# Altium PCB NearFieldProbeSet.PcbDoc (part 3 of 3)
Units mm, origin at the board's own origin, x right, y up, seen from the top; angles counter-clockwise.
Board outline 100 x 100 mm, 6 copper layers (Top Layer, Int1, Int2 (SIG), Int3, Int4, Bottom Layer), stack 1.538 mm thick; 8 components, 12 nets, 232 pads, 4318 vias.
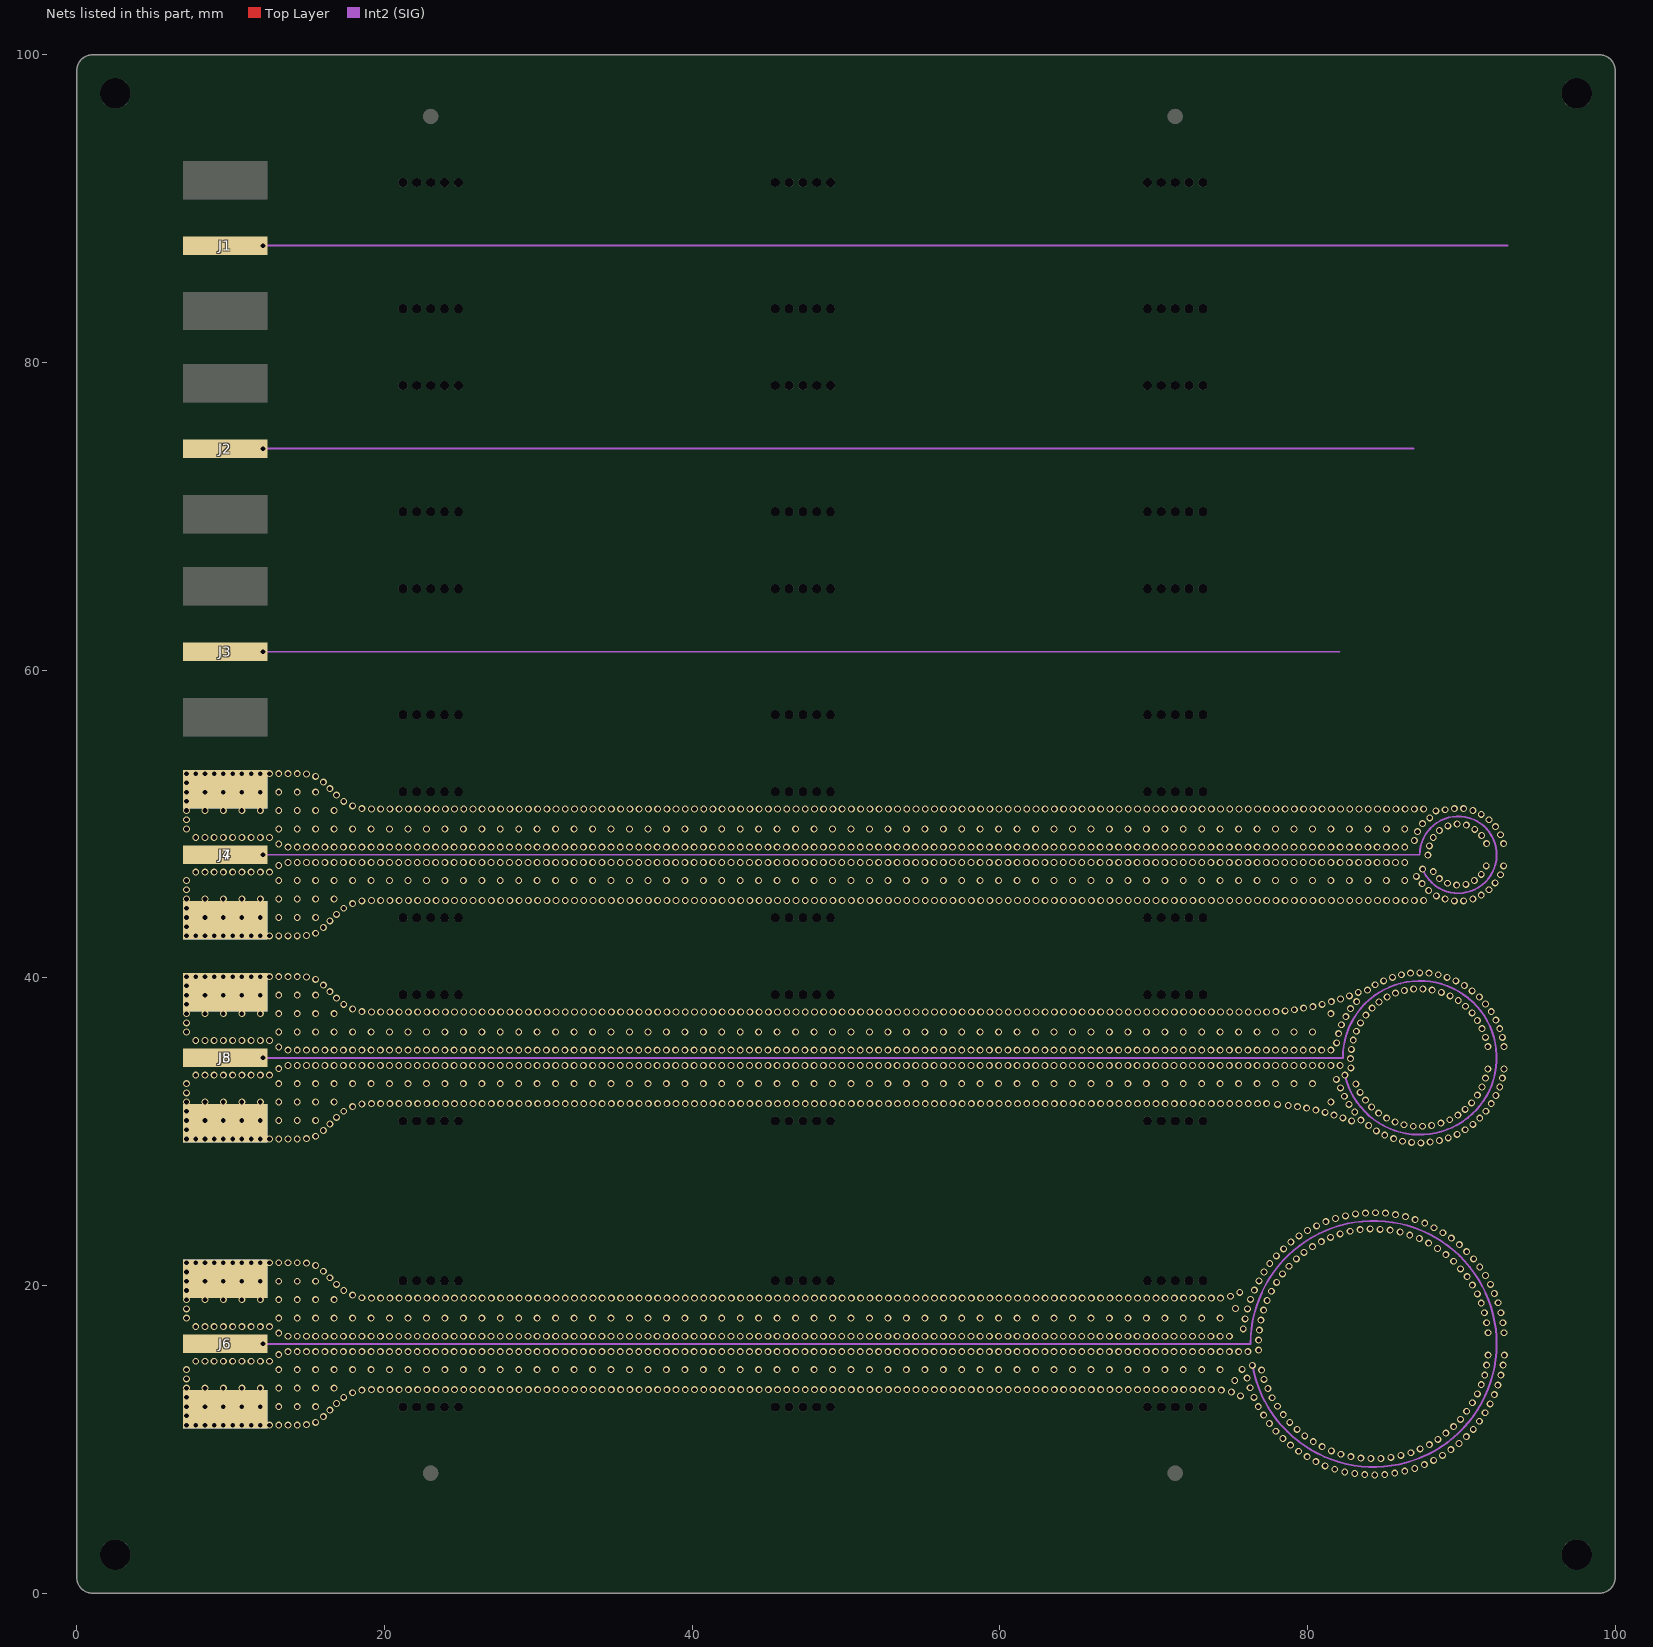
[diagram p7: the nets of this part, all layers, seen from the top]

## Via types
v1: diameter 0.45, hole 0.3, Top Layer to Bottom Layer, tented both sides, 4318 vias

## Nets (pads, with @x,y where several pads share a name; then routed paths per layer and width w, separated by ;. In a path a pad name is that pad's centre, name@x,y a point inside that pad or via, vN(x,y) a via of type N, cw(c..) or ccw(c..) an arc to the next point about the centre after c; other vN are vias at no path point) (continued)
GND4: J4.2 J4.3 J4.4 J4.5 J7.2 J7.3 J7.4 J7.5
  other v1: 7.125,42.725 7.725,42.725 8.325,42.725 8.925,42.725 9.525,42.725 10.125,42.725 10.725,42.725 11.325,42.725 11.925,42.725 12.525,42.725 13.125,42.725 13.725,42.725 14.325,42.725 14.925,42.75 15.525,42.9 16.025,43.275 7.125,43.325 16.45,43.7 7.125,43.925 8.325,43.925 9.525,43.925 10.725,43.925 11.925,43.925 13.125,43.925 14.325,43.925 15.525,43.925 16.875,44.125 7.125,44.525 17.35,44.525 17.925,44.825 18.525,45 89.55,45 90.15,45 19.15,45.025 19.75,45.025 20.35,45.025 20.95,45.025 21.55,45.025 22.15,45.025 22.75,45.025 23.35,45.025 23.95,45.025 24.55,45.025 25.15,45.025 25.75,45.025 26.35,45.025 26.95,45.025 27.55,45.025 28.15,45.025 28.75,45.025 29.35,45.025 29.95,45.025 30.55,45.025 31.15,45.025 31.75,45.025 32.35,45.025 32.95,45.025 33.55,45.025 34.15,45.025 34.75,45.025 35.35,45.025 35.95,45.025 36.55,45.025 37.15,45.025 37.75,45.025 38.35,45.025 38.95,45.025 39.55,45.025 40.15,45.025 40.75,45.025 41.35,45.025 41.95,45.025 42.55,45.025 43.15,45.025 43.75,45.025 44.35,45.025 44.95,45.025 45.55,45.025 46.15,45.025 46.75,45.025 47.35,45.025 47.95,45.025 48.55,45.025 49.15,45.025 49.75,45.025 50.35,45.025 50.95,45.025 51.55,45.025 52.15,45.025 52.75,45.025 53.35,45.025 53.95,45.025 54.55,45.025 55.15,45.025 55.75,45.025 56.35,45.025 56.95,45.025 57.55,45.025 58.15,45.025 58.75,45.025 59.35,45.025 59.95,45.025 60.55,45.025 61.15,45.025 61.75,45.025 62.35,45.025 62.95,45.025 63.55,45.025 64.15,45.025 64.75,45.025 65.35,45.025 65.95,45.025 66.55,45.025 67.15,45.025 67.75,45.025 68.35,45.025 68.95,45.025 69.55,45.025 70.15,45.025 70.75,45.025 71.35,45.025 71.95,45.025 72.55,45.025 73.15,45.025 73.75,45.025 74.35,45.025 74.95,45.025 75.55,45.025 76.15,45.025 76.75,45.025 77.35,45.025 77.95,45.025 78.55,45.025 79.15,45.025 79.75,45.025 80.35,45.025 80.95,45.025 81.55,45.025 82.15,45.025 82.75,45.025 83.35,45.025 83.95,45.025 84.55,45.025 85.15,45.025 85.75,45.025 86.35,45.025 86.95,45.025 87.55,45.025 7.125,45.125 8.325,45.125 9.525,45.125 10.725,45.125 11.925,45.125 13.125,45.125 14.325,45.125 15.525,45.125 16.725,45.125 88.95,45.125 90.75,45.125 88.375,45.325 91.3,45.375 87.875,45.675 7.125,45.725 91.8,45.725 89.7,46.025 90.3,46.075 87.45,46.125 89.1,46.15 92.2,46.175 7.125,46.325 13.125,46.325 14.325,46.325 15.525,46.325 16.725,46.325 17.925,46.325 19.125,46.325 20.325,46.325 21.525,46.325 22.725,46.325 23.925,46.325 25.125,46.325 26.325,46.325 27.525,46.325 28.725,46.325 29.925,46.325 31.125,46.325 32.325,46.325 33.525,46.325 34.725,46.325 35.925,46.325 37.125,46.325 38.325,46.325 39.525,46.325 40.725,46.325 41.925,46.325 43.125,46.325 44.325,46.325 45.525,46.325 46.725,46.325 47.925,46.325 49.125,46.325 50.325,46.325 51.525,46.325 52.725,46.325 53.925,46.325 55.125,46.325 56.325,46.325 57.525,46.325 58.725,46.325 59.925,46.325 61.125,46.325 62.325,46.325 63.525,46.325 64.725,46.325 65.925,46.325 67.125,46.325 68.325,46.325 69.525,46.325 70.725,46.325 71.925,46.325 73.125,46.325 74.325,46.325 75.525,46.325 76.725,46.325 77.925,46.325 79.125,46.325 80.325,46.325 81.525,46.325 82.725,46.325 83.925,46.325 85.125,46.325 86.325,46.325 90.85,46.325 88.575,46.45 87.075,46.6 92.55,46.7 91.3,46.725 7.725,46.875 8.325,46.875 8.925,46.875 9.525,46.875 10.125,46.875 10.725,46.875 11.325,46.875 11.925,46.875 12.525,46.875 88.175,46.9 87.482,47.063 91.625,47.275 92.75,47.275 13.125,47.3 13.725,47.5 14.325,47.5 14.925,47.5 15.525,47.5 16.125,47.5 16.725,47.5 17.325,47.5 17.925,47.5 18.525,47.5 19.125,47.5 19.725,47.5 20.325,47.5 20.925,47.5 21.525,47.5 22.125,47.5 22.725,47.5 23.325,47.5 23.925,47.5 24.525,47.5 25.125,47.5 25.725,47.5 26.325,47.5 26.925,47.5 27.525,47.5 28.125,47.5 28.725,47.5 29.325,47.5 29.925,47.5 30.525,47.5 31.125,47.5 31.725,47.5 32.325,47.5 32.925,47.5 33.525,47.5 34.125,47.5 34.725,47.5 35.325,47.5 35.925,47.5 36.525,47.5 37.125,47.5 37.725,47.5 38.325,47.5 38.925,47.5 39.525,47.5 40.125,47.5 40.725,47.5 41.325,47.5 41.925,47.5 42.525,47.5 43.125,47.5 43.725,47.5 44.325,47.5 44.925,47.5 45.525,47.5 46.125,47.5 46.725,47.5 47.325,47.5 47.925,47.5 48.525,47.5 49.125,47.5 49.725,47.5 50.325,47.5 50.925,47.5 51.525,47.5 52.125,47.5 52.725,47.5 53.325,47.5 53.925,47.5 54.525,47.5 55.125,47.5 55.725,47.5 56.325,47.5 56.925,47.5 57.525,47.5 58.125,47.5 58.725,47.5 59.325,47.5 59.925,47.5 60.525,47.5 61.125,47.5 61.725,47.5 62.325,47.5 62.925,47.5 63.525,47.5 64.125,47.5 64.725,47.5 65.325,47.5 65.925,47.5 66.525,47.5 67.125,47.5 67.725,47.5 68.325,47.5 68.925,47.5 69.525,47.5 70.125,47.5 70.725,47.5 71.325,47.5 71.925,47.5 72.525,47.5 73.125,47.5 73.725,47.5 74.325,47.5 74.925,47.5 75.525,47.5 76.125,47.5 76.725,47.5 77.325,47.5 77.925,47.5 78.525,47.5 79.125,47.5 79.725,47.5 80.325,47.5 80.925,47.5 81.525,47.5 82.125,47.5 82.725,47.5 83.325,47.5 83.925,47.5 84.525,47.5 85.125,47.5 85.725,47.5 86.325,47.5 87.825,47.975 13.725,48.5 14.325,48.5 14.925,48.5 15.525,48.5 16.125,48.5 16.725,48.5 17.325,48.5 17.925,48.5 18.525,48.5 19.125,48.5 19.725,48.5 20.325,48.5 20.925,48.5 21.525,48.5 22.125,48.5 22.725,48.5 23.325,48.5 23.925,48.5 24.525,48.5 25.125,48.5 25.725,48.5 26.325,48.5 26.925,48.5 27.525,48.5 28.125,48.5 28.725,48.5 29.325,48.5 29.925,48.5 30.525,48.5 31.125,48.5 31.725,48.5 32.325,48.5 32.925,48.5 33.525,48.5 34.125,48.5 34.725,48.5 35.325,48.5 35.925,48.5 36.525,48.5 37.125,48.5 37.725,48.5 38.325,48.5 38.925,48.5 39.525,48.5 40.125,48.5 40.725,48.5 41.325,48.5 41.925,48.5 42.525,48.5 43.125,48.5 43.725,48.5 44.325,48.5 44.925,48.5 45.525,48.5 46.125,48.5 46.725,48.5 47.325,48.5 47.925,48.5 48.525,48.5 49.125,48.5 49.725,48.5 50.325,48.5 50.925,48.5 51.525,48.5 52.125,48.5 52.725,48.5 53.325,48.5 53.925,48.5 54.525,48.5 55.125,48.5 55.725,48.5 56.325,48.5 56.925,48.5 57.525,48.5 58.125,48.5 58.725,48.5 59.325,48.5 59.925,48.5 60.525,48.5 61.125,48.5 61.725,48.5 62.325,48.5 62.925,48.5 63.525,48.5 64.125,48.5 64.725,48.5 65.325,48.5 65.925,48.5 66.525,48.5 67.125,48.5 67.725,48.5 68.325,48.5 68.925,48.5 69.525,48.5 70.125,48.5 70.725,48.5 71.325,48.5 71.925,48.5 72.525,48.5 73.125,48.5 73.725,48.5 74.325,48.5 74.925,48.5 75.525,48.5 76.125,48.5 76.725,48.5 77.325,48.5 77.925,48.5 78.525,48.5 79.125,48.5 79.725,48.5 80.325,48.5 80.925,48.5 81.525,48.5 82.125,48.5 82.725,48.5 83.325,48.5 83.925,48.5 84.525,48.5 85.125,48.5 85.725,48.5 86.325,48.5 87.925,48.575 13.125,48.7 91.65,48.725 92.75,48.725 86.95,48.925 7.725,49.125 8.325,49.125 8.925,49.125 9.525,49.125 10.125,49.125 10.725,49.125 11.325,49.125 11.925,49.125 12.525,49.125 88.175,49.125 91.325,49.25 92.55,49.3 87.15,49.5 88.575,49.575 90.875,49.65 7.125,49.675 13.125,49.675 14.325,49.675 15.525,49.675 16.725,49.675 17.925,49.675 19.125,49.675 20.325,49.675 21.525,49.675 22.725,49.675 23.925,49.675 25.125,49.675 26.325,49.675 27.525,49.675 28.725,49.675 29.925,49.675 31.125,49.675 32.325,49.675 33.525,49.675 34.725,49.675 35.925,49.675 37.125,49.675 38.325,49.675 39.525,49.675 40.725,49.675 41.925,49.675 43.125,49.675 44.325,49.675 45.525,49.675 46.725,49.675 47.925,49.675 49.125,49.675 50.325,49.675 51.525,49.675 52.725,49.675 53.925,49.675 55.125,49.675 56.325,49.675 57.525,49.675 58.725,49.675 59.925,49.675 61.125,49.675 62.325,49.675 63.525,49.675 64.725,49.675 65.925,49.675 67.125,49.675 68.325,49.675 69.525,49.675 70.725,49.675 71.925,49.675 73.125,49.675 74.325,49.675 75.525,49.675 76.725,49.675 77.925,49.675 79.125,49.675 80.325,49.675 81.525,49.675 82.725,49.675 83.925,49.675 85.125,49.675 86.325,49.675 92.225,49.825 89.125,49.875 90.325,49.925 87.475,50.025 89.725,50 7.125,50.275 91.8,50.275 87.95,50.4 91.3,50.625 88.35,50.85 7.125,50.875 8.325,50.875 9.525,50.875 10.725,50.875 11.925,50.875 13.125,50.875 14.325,50.875 15.525,50.875 16.725,50.875 90.75,50.875 88.95,50.925 19.15,50.975 19.75,50.975 20.35,50.975 20.95,50.975 21.55,50.975 22.15,50.975 22.75,50.975 23.35,50.975 23.95,50.975 24.55,50.975 25.15,50.975 25.75,50.975 26.35,50.975 26.95,50.975 27.55,50.975 28.15,50.975 28.75,50.975 29.35,50.975 29.95,50.975 30.55,50.975 31.15,50.975 31.75,50.975 32.35,50.975 32.95,50.975 33.55,50.975 34.15,50.975 34.75,50.975 35.35,50.975 35.95,50.975 36.55,50.975 37.15,50.975 37.75,50.975 38.35,50.975 38.95,50.975 39.55,50.975 40.15,50.975 40.75,50.975 41.35,50.975 41.95,50.975 42.55,50.975 43.15,50.975 43.75,50.975 44.35,50.975 44.95,50.975 45.55,50.975 46.15,50.975 46.75,50.975 47.35,50.975 47.95,50.975 48.55,50.975 49.15,50.975 49.75,50.975 50.35,50.975 50.95,50.975 51.55,50.975 52.15,50.975 52.75,50.975 53.35,50.975 53.95,50.975 54.55,50.975 55.15,50.975 55.75,50.975 56.35,50.975 56.95,50.975 57.55,50.975 58.15,50.975 58.75,50.975 59.35,50.975 59.95,50.975 60.55,50.975 61.15,50.975 61.75,50.975 62.35,50.975 62.95,50.975 63.55,50.975 64.15,50.975 64.75,50.975 65.35,50.975 65.95,50.975 66.55,50.975 67.15,50.975 67.75,50.975 68.35,50.975 68.95,50.975 69.55,50.975 70.15,50.975 70.75,50.975 71.35,50.975 71.95,50.975 72.55,50.975 73.15,50.975 73.75,50.975 74.35,50.975 74.95,50.975 75.55,50.975 76.15,50.975 76.75,50.975 77.35,50.975 77.95,50.975 78.55,50.975 79.15,50.975 79.75,50.975 80.35,50.975 80.95,50.975 81.55,50.975 82.15,50.975 82.75,50.975 83.35,50.975 83.95,50.975 84.55,50.975 85.15,50.975 85.75,50.975 86.35,50.975 86.95,50.975 87.55,50.975 18.525,51 89.55,51 90.15,51 17.925,51.175 7.125,51.475 17.35,51.475 16.875,51.875 7.125,52.075 8.325,52.075 9.525,52.075 10.725,52.075 11.925,52.075 13.125,52.075 14.325,52.075 15.525,52.075 16.45,52.3 7.125,52.675 16.025,52.725 15.525,53.1 14.925,53.25 7.125,53.275 7.725,53.275 8.325,53.275 8.925,53.275 9.525,53.275 10.125,53.275 10.725,53.275 11.325,53.275 11.925,53.275 12.525,53.275 13.125,53.275 13.725,53.275 14.325,53.275
GND5: J5.2 J5.3 J5.4 J5.5 J8.2 J8.3 J8.4 J8.5
  other v1: 87.375,29.275 86.775,29.3 87.975,29.325 86.175,29.375 88.575,29.425 7.125,29.525 7.725,29.525 8.325,29.525 8.925,29.525 9.525,29.525 10.125,29.525 10.725,29.525 11.325,29.525 11.925,29.525 12.525,29.525 13.125,29.525 13.725,29.525 14.325,29.525 14.925,29.55 85.6,29.55 89.15,29.6 15.525,29.7 85.025,29.775 89.725,29.825 84.475,30.05 16.025,30.075 7.125,30.125 90.25,30.125 86.875,30.35 87.475,30.35 83.975,30.4 88.075,30.4 86.275,30.45 90.75,30.475 16.45,30.5 88.675,30.55 85.7,30.625 82.875,30.7 7.125,30.725 8.325,30.725 9.525,30.725 10.725,30.725 11.925,30.725 13.125,30.725 14.325,30.725 15.525,30.725 83.475,30.75 89.25,30.775 85.15,30.875 91.2,30.875 82.3,30.9 16.875,30.925 81.725,31.075 89.775,31.075 84.625,31.2 81.15,31.25 83.075,31.275 7.125,31.325 17.35,31.325 91.6,31.325 80.55,31.4 90.25,31.45 79.95,31.525 84.175,31.6 17.925,31.625 79.35,31.625 78.75,31.7 78.05,31.775 82.7,31.775 18.525,31.8 19.15,31.825 19.75,31.825 20.35,31.825 20.95,31.825 21.55,31.825 22.15,31.825 22.75,31.825 23.35,31.825 23.95,31.825 24.55,31.825 25.15,31.825 25.75,31.825 26.35,31.825 26.95,31.825 27.55,31.825 28.15,31.825 28.75,31.825 29.35,31.825 29.95,31.825 30.55,31.825 31.15,31.825 31.75,31.825 32.35,31.825 32.95,31.825 33.55,31.825 34.15,31.825 34.75,31.825 35.35,31.825 35.95,31.825 36.55,31.825 37.15,31.825 37.75,31.825 38.35,31.825 38.95,31.825 39.55,31.825 40.15,31.825 40.75,31.825 41.35,31.825 41.95,31.825 42.55,31.825 43.15,31.825 43.75,31.825 44.35,31.825 44.95,31.825 45.55,31.825 46.15,31.825 46.75,31.825 47.35,31.825 47.95,31.825 48.55,31.825 49.15,31.825 49.75,31.825 50.35,31.825 50.95,31.825 51.55,31.825 52.15,31.825 52.75,31.825 53.35,31.825 53.95,31.825 54.55,31.825 55.15,31.825 55.75,31.825 56.35,31.825 56.95,31.825 57.55,31.825 58.15,31.825 58.75,31.825 59.35,31.825 59.95,31.825 60.55,31.825 61.15,31.825 61.75,31.825 62.35,31.825 62.95,31.825 63.55,31.825 64.15,31.825 64.75,31.825 65.35,31.825 65.95,31.825 66.55,31.825 67.15,31.825 67.75,31.825 68.35,31.825 68.95,31.825 69.55,31.825 70.15,31.825 70.75,31.825 71.35,31.825 71.95,31.825 72.55,31.825 73.15,31.825 73.75,31.825 74.35,31.825 74.95,31.825 75.55,31.825 76.15,31.825 76.75,31.825 77.35,31.825 91.95,31.825 90.675,31.875 7.125,31.925 8.325,31.925 9.525,31.925 10.725,31.925 11.925,31.925 13.125,31.925 14.325,31.925 15.525,31.925 16.725,31.925 81.525,31.925 83.775,32.05 82.4,32.3 92.25,32.35 91.05,32.375 7.125,32.525 83.425,32.55 82.15,32.85 91.35,32.9 92.5,32.9 83.15,33.1 7.125,33.125 13.125,33.125 14.325,33.125 15.525,33.125 16.725,33.125 17.925,33.125 19.125,33.125 20.325,33.125 21.525,33.125 22.725,33.125 23.925,33.125 25.125,33.125 26.325,33.125 27.525,33.125 28.725,33.125 29.925,33.125 31.125,33.125 32.325,33.125 33.525,33.125 34.725,33.125 35.925,33.125 37.125,33.125 38.325,33.125 39.525,33.125 40.725,33.125 41.925,33.125 43.125,33.125 44.325,33.125 45.525,33.125 46.725,33.125 47.925,33.125 49.125,33.125 50.325,33.125 51.525,33.125 52.725,33.125 53.925,33.125 55.125,33.125 56.325,33.125 57.525,33.125 58.725,33.125 59.925,33.125 61.125,33.125 62.325,33.125 63.525,33.125 64.725,33.125 65.925,33.125 67.125,33.125 68.325,33.125 69.525,33.125 70.725,33.125 71.925,33.125 73.125,33.125 74.325,33.125 75.525,33.125 76.725,33.125 77.925,33.125 79.125,33.125 80.325,33.125 81.875,33.4 91.575,33.475 92.675,33.475 7.725,33.675 8.325,33.675 8.925,33.675 9.525,33.675 10.125,33.675 10.725,33.675 11.325,33.675 11.925,33.675 12.525,33.675 82.428,33.675 91.725,34.075 92.775,34.075 13.125,34.1 82.825,34.15 13.725,34.3 14.325,34.3 14.925,34.3 15.525,34.3 16.125,34.3 16.725,34.3 17.325,34.3 17.925,34.3 18.525,34.3 19.125,34.3 19.725,34.3 20.325,34.3 20.925,34.3 21.525,34.3 22.125,34.3 22.725,34.3 23.325,34.3 23.925,34.3 24.525,34.3 25.125,34.3 25.725,34.3 26.325,34.3 26.925,34.3 27.525,34.3 28.125,34.3 28.725,34.3 29.325,34.3 29.925,34.3 30.525,34.3 31.125,34.3 31.725,34.3 32.325,34.3 32.925,34.3 33.525,34.3 34.125,34.3 34.725,34.3 35.325,34.3 35.925,34.3 36.525,34.3 37.125,34.3 37.725,34.3 38.325,34.3 38.925,34.3 39.525,34.3 40.125,34.3 40.725,34.3 41.325,34.3 41.925,34.3 42.525,34.3 43.125,34.3 43.725,34.3 44.325,34.3 44.925,34.3 45.525,34.3 46.125,34.3 46.725,34.3 47.325,34.3 47.925,34.3 48.525,34.3 49.125,34.3 49.725,34.3 50.325,34.3 50.925,34.3 51.525,34.3 52.125,34.3 52.725,34.3 53.325,34.3 53.925,34.3 54.525,34.3 55.125,34.3 55.725,34.3 56.325,34.3 56.925,34.3 57.525,34.3 58.125,34.3 58.725,34.3 59.325,34.3 59.925,34.3 60.525,34.3 61.125,34.3 61.725,34.3 62.325,34.3 62.925,34.3 63.525,34.3 64.125,34.3 64.725,34.3 65.325,34.3 65.925,34.3 66.525,34.3 67.125,34.3 67.725,34.3 68.325,34.3 68.925,34.3 69.525,34.3 70.125,34.3 70.725,34.3 71.325,34.3 71.925,34.3 72.525,34.3 73.125,34.3 73.725,34.3 74.325,34.3 74.925,34.3 75.525,34.3 76.125,34.3 76.725,34.3 77.325,34.3 77.925,34.3 78.525,34.3 79.125,34.3 79.725,34.3 80.325,34.3 80.925,34.3 81.525,34.3 82.125,34.3 82.8,34.75 13.725,35.3 14.325,35.3 14.925,35.3 15.525,35.3 16.125,35.3 16.725,35.3 17.325,35.3 17.925,35.3 18.525,35.3 19.125,35.3 19.725,35.3 20.325,35.3 20.925,35.3 21.525,35.3 22.125,35.3 22.725,35.3 23.325,35.3 23.925,35.3 24.525,35.3 25.125,35.3 25.725,35.3 26.325,35.3 26.925,35.3 27.525,35.3 28.125,35.3 28.725,35.3 29.325,35.3 29.925,35.3 30.525,35.3 31.125,35.3 31.725,35.3 32.325,35.3 32.925,35.3 33.525,35.3 34.125,35.3 34.725,35.3 35.325,35.3 35.925,35.3 36.525,35.3 37.125,35.3 37.725,35.3 38.325,35.3 38.925,35.3 39.525,35.3 40.125,35.3 40.725,35.3 41.325,35.3 41.925,35.3 42.525,35.3 43.125,35.3 43.725,35.3 44.325,35.3 44.925,35.3 45.525,35.3 46.125,35.3 46.725,35.3 47.325,35.3 47.925,35.3 48.525,35.3 49.125,35.3 49.725,35.3 50.325,35.3 50.925,35.3 51.525,35.3 52.125,35.3 52.725,35.3 53.325,35.3 53.925,35.3 54.525,35.3 55.125,35.3 55.725,35.3 56.325,35.3 56.925,35.3 57.525,35.3 58.125,35.3 58.725,35.3 59.325,35.3 59.925,35.3 60.525,35.3 61.125,35.3 61.725,35.3 62.325,35.3 62.925,35.3 63.525,35.3 64.125,35.3 64.725,35.3 65.325,35.3 65.925,35.3 66.525,35.3 67.125,35.3 67.725,35.3 68.325,35.3 68.925,35.3 69.525,35.3 70.125,35.3 70.725,35.3 71.325,35.3 71.925,35.3 72.525,35.3 73.125,35.3 73.725,35.3 74.325,35.3 74.925,35.3 75.525,35.3 76.125,35.3 76.725,35.3 77.325,35.3 77.925,35.3 78.525,35.3 79.125,35.3 79.725,35.3 80.325,35.3 80.925,35.3 81.525,35.3 82.85,35.35 13.125,35.5 91.725,35.525 92.775,35.525 81.9,35.775 7.725,35.925 8.325,35.925 8.925,35.925 9.525,35.925 10.125,35.925 10.725,35.925 11.325,35.925 11.925,35.925 12.525,35.925 82.975,35.95 91.575,36.125 92.675,36.125 82.025,36.375 7.125,36.475 13.125,36.475 14.325,36.475 15.525,36.475 16.725,36.475 17.925,36.475 19.125,36.475 20.325,36.475 21.525,36.475 22.725,36.475 23.925,36.475 25.125,36.475 26.325,36.475 27.525,36.475 28.725,36.475 29.925,36.475 31.125,36.475 32.325,36.475 33.525,36.475 34.725,36.475 35.925,36.475 37.125,36.475 38.325,36.475 39.525,36.475 40.725,36.475 41.925,36.475 43.125,36.475 44.325,36.475 45.525,36.475 46.725,36.475 47.925,36.475 49.125,36.475 50.325,36.475 51.525,36.475 52.725,36.475 53.925,36.475 55.125,36.475 56.325,36.475 57.525,36.475 58.725,36.475 59.925,36.475 61.125,36.475 62.325,36.475 63.525,36.475 64.725,36.475 65.925,36.475 67.125,36.475 68.325,36.475 69.525,36.475 70.725,36.475 71.925,36.475 73.125,36.475 74.325,36.475 75.525,36.475 76.725,36.475 77.925,36.475 79.125,36.475 80.325,36.475 83.175,36.525 91.35,36.7 92.5,36.7 82.2,36.95 7.125,37.075 83.45,37.075 91.05,37.225 92.25,37.25 82.5,37.475 83.8,37.575 7.125,37.675 8.325,37.675 9.525,37.675 10.725,37.675 11.925,37.675 13.125,37.675 14.325,37.675 15.525,37.675 16.725,37.675 81.525,37.675 90.7,37.725 19.15,37.775 19.75,37.775 20.35,37.775 20.95,37.775 21.55,37.775 22.15,37.775 22.75,37.775 23.35,37.775 23.95,37.775 24.55,37.775 25.15,37.775 25.75,37.775 26.35,37.775 26.95,37.775 27.55,37.775 28.15,37.775 28.75,37.775 29.35,37.775 29.95,37.775 30.55,37.775 31.15,37.775 31.75,37.775 32.35,37.775 32.95,37.775 33.55,37.775 34.15,37.775 34.75,37.775 35.35,37.775 35.95,37.775 36.55,37.775 37.15,37.775 37.75,37.775 38.35,37.775 38.95,37.775 39.55,37.775 40.15,37.775 40.75,37.775 41.35,37.775 41.95,37.775 42.55,37.775 43.15,37.775 43.75,37.775 44.35,37.775 44.95,37.775 45.55,37.775 46.15,37.775 46.75,37.775 47.35,37.775 47.95,37.775 48.55,37.775 49.15,37.775 49.75,37.775 50.35,37.775 50.95,37.775 51.55,37.775 52.15,37.775 52.75,37.775 53.35,37.775 53.95,37.775 54.55,37.775 55.15,37.775 55.75,37.775 56.35,37.775 56.95,37.775 57.55,37.775 58.15,37.775 58.75,37.775 59.35,37.775 59.95,37.775 60.55,37.775 61.15,37.775 61.75,37.775 62.35,37.775 62.95,37.775 63.55,37.775 64.15,37.775 64.75,37.775 65.35,37.775 65.95,37.775 66.55,37.775 67.15,37.775 67.75,37.775 68.35,37.775 68.95,37.775 69.55,37.775 70.15,37.775 70.75,37.775 71.35,37.775 71.95,37.775 72.55,37.775 73.15,37.775 73.75,37.775 74.35,37.775 74.95,37.775 75.55,37.775 76.15,37.775 76.75,37.775 77.35,37.775 18.525,37.8 77.95,37.8 91.95,37.8 78.55,37.85 79.15,37.925 17.925,37.975 82.8,38 79.75,38.025 84.2,38.025 80.35,38.125 90.275,38.15 7.125,38.275 17.35,38.275 80.95,38.275 91.575,38.3 84.65,38.425 81.55,38.45 83.2,38.45 89.8,38.525 82.15,38.625 16.875,38.675 85.175,38.75 91.175,38.75 82.725,38.825 89.275,38.825 7.125,38.875 8.325,38.875 9.525,38.875 10.725,38.875 11.925,38.875 13.125,38.875 14.325,38.875 15.525,38.875 85.725,39 83.3,39.05 88.7,39.05 16.45,39.1 90.7,39.15 86.3,39.175 83.9,39.2 88.1,39.2 86.9,39.275 87.5,39.275 7.125,39.475 90.2,39.5 16.025,39.525 84.4,39.55 84.95,39.8 89.65,39.8 15.525,39.9 85.525,40.025 89.075,40.025 14.925,40.05 7.125,40.075 7.725,40.075 8.325,40.075 8.925,40.075 9.525,40.075 10.125,40.075 10.725,40.075 11.325,40.075 11.925,40.075 12.525,40.075 13.125,40.075 13.725,40.075 14.325,40.075 86.1,40.2 88.5,40.2 86.7,40.3 87.9,40.3 87.3,40.325
GND6: J6.2 J6.3 J6.4 J6.5
  other v1: 84.375,7.675 83.725,7.7 85.025,7.7 83.075,7.775 85.675,7.8 82.425,7.875 86.325,7.925 81.775,8.05 86.975,8.1 81.15,8.275 87.6,8.35 80.55,8.55 88.2,8.625 84.125,8.75 84.775,8.75 83.475,8.775 85.425,8.825 79.975,8.875 82.825,8.875 86.075,8.95 88.775,8.95 82.175,9.025 86.725,9.125 79.425,9.225 81.55,9.25 89.325,9.325 87.325,9.375 80.95,9.525 78.9,9.625 87.925,9.65 89.85,9.725 80.375,9.85 88.475,10 78.4,10.05 90.325,10.175 79.825,10.225 89,10.4 77.95,10.525 79.325,10.65 90.775,10.65 89.5,10.825 7.125,10.925 7.725,10.925 8.325,10.925 8.925,10.925 9.525,10.925 10.125,10.925 10.725,10.925 11.325,10.925 11.925,10.925 12.525,10.925 13.125,10.925 13.725,10.925 14.325,10.925 14.925,10.95 77.525,11.025 15.525,11.1 78.85,11.1 91.175,11.175 89.95,11.3 16.025,11.475 7.125,11.525 77.15,11.575 78.425,11.6 91.55,11.725 90.35,11.825 16.45,11.9 7.125,12.125 8.325,12.125 9.525,12.125 10.725,12.125 11.925,12.125 13.125,12.125 14.325,12.125 15.525,12.125 76.8,12.125 78.05,12.15 91.875,12.3 16.875,12.325 90.725,12.375 77.7,12.7 7.125,12.725 17.35,12.725 76.525,12.725 75.65,12.825 92.15,12.9 91.05,12.95 17.925,13.025 75.05,13.075 18.525,13.2 74.4,13.2 19.15,13.225 19.75,13.225 20.35,13.225 20.95,13.225 21.55,13.225 22.15,13.225 22.75,13.225 23.35,13.225 23.95,13.225 24.55,13.225 25.15,13.225 25.75,13.225 26.35,13.225 26.95,13.225 27.55,13.225 28.15,13.225 28.75,13.225 29.35,13.225 29.95,13.225 30.55,13.225 31.15,13.225 31.75,13.225 32.35,13.225 32.95,13.225 33.55,13.225 34.15,13.225 34.75,13.225 35.35,13.225 35.95,13.225 36.55,13.225 37.15,13.225 37.75,13.225 38.35,13.225 38.95,13.225 39.55,13.225 40.15,13.225 40.75,13.225 41.35,13.225 41.95,13.225 42.55,13.225 43.15,13.225 43.75,13.225 44.35,13.225 44.95,13.225 45.55,13.225 46.15,13.225 46.75,13.225 47.35,13.225 47.95,13.225 48.55,13.225 49.15,13.225 49.75,13.225 50.35,13.225 50.95,13.225 51.55,13.225 52.15,13.225 52.75,13.225 53.35,13.225 53.95,13.225 54.55,13.225 55.15,13.225 55.75,13.225 56.35,13.225 56.95,13.225 57.55,13.225 58.15,13.225 58.75,13.225 59.35,13.225 59.95,13.225 60.55,13.225 61.15,13.225 61.75,13.225 62.35,13.225 62.95,13.225 63.55,13.225 64.15,13.225 64.75,13.225 65.35,13.225 65.95,13.225 66.55,13.225 67.15,13.225 67.75,13.225 68.35,13.225 68.95,13.225 69.55,13.225 70.15,13.225 70.75,13.225 71.35,13.225 71.95,13.225 72.55,13.225 73.15,13.225 73.75,13.225 77.425,13.3 7.125,13.325 8.325,13.325 9.525,13.325 10.725,13.325 11.925,13.325 13.125,13.325 14.325,13.325 15.525,13.325 16.725,13.325 76.275,13.35 92.375,13.525 91.3,13.55 75.275,13.825 77.175,13.9 7.125,13.925 76.075,13.975 91.525,14.175 92.575,14.175 77.025,14.5 7.125,14.525 13.125,14.525 14.325,14.525 15.525,14.525 16.725,14.525 17.925,14.525 19.125,14.525 20.325,14.525 21.525,14.525 22.725,14.525 23.925,14.525 25.125,14.525 26.325,14.525 27.525,14.525 28.725,14.525 29.925,14.525 31.125,14.525 32.325,14.525 33.525,14.525 34.725,14.525 35.925,14.525 37.125,14.525 38.325,14.525 39.525,14.525 40.725,14.525 41.925,14.525 43.125,14.525 44.325,14.525 45.525,14.525 46.725,14.525 47.925,14.525 49.125,14.525 50.325,14.525 51.525,14.525 52.725,14.525 53.925,14.525 55.125,14.525 56.325,14.525 57.525,14.525 58.725,14.525 59.925,14.525 61.125,14.525 62.325,14.525 63.525,14.525 64.725,14.525 65.925,14.525 67.125,14.525 68.325,14.525 69.525,14.525 70.725,14.525 71.925,14.525 73.125,14.525 74.325,14.525 75.75,14.55 76.422,14.811 91.65,14.825 92.725,14.825 7.725,15.075 8.325,15.075 8.925,15.075 9.525,15.075 10.125,15.075 10.725,15.075 11.325,15.075 11.925,15.075 12.525,15.075 91.75,15.475 92.8,15.475 13.125,15.5 13.725,15.7 14.325,15.7 14.925,15.7 15.525,15.7 16.125,15.7 16.725,15.7 17.325,15.7 17.925,15.7 18.525,15.7 19.125,15.7 19.725,15.7 20.325,15.7 20.925,15.7 21.525,15.7 22.125,15.7 22.725,15.7 23.325,15.7 23.925,15.7 24.525,15.7 25.125,15.7 25.725,15.7 26.325,15.7 26.925,15.7 27.525,15.7 28.125,15.7 28.725,15.7 29.325,15.7 29.925,15.7 30.525,15.7 31.125,15.7 31.725,15.7 32.325,15.7 32.925,15.7 33.525,15.7 34.125,15.7 34.725,15.7 35.325,15.7 35.925,15.7 36.525,15.7 37.125,15.7 37.725,15.7 38.325,15.7 38.925,15.7 39.525,15.7 40.125,15.7 40.725,15.7 41.325,15.7 41.925,15.7 42.525,15.7 43.125,15.7 43.725,15.7 44.325,15.7 44.925,15.7 45.525,15.7 46.125,15.7 46.725,15.7 47.325,15.7 47.925,15.7 48.525,15.7 49.125,15.7 49.725,15.7 50.325,15.7 50.925,15.7 51.525,15.7 52.125,15.7 52.725,15.7 53.325,15.7 53.925,15.7 54.525,15.7 55.125,15.7 55.725,15.7 56.325,15.7 56.925,15.7 57.525,15.7 58.125,15.7 58.725,15.7 59.325,15.7 59.925,15.7 60.525,15.7 61.125,15.7 61.725,15.7 62.325,15.7 62.925,15.7 63.525,15.7 64.125,15.7 64.725,15.7 65.325,15.7 65.925,15.7 66.525,15.7 67.125,15.7 67.725,15.7 68.325,15.7 68.925,15.7 69.525,15.7 70.125,15.7 70.725,15.7 71.325,15.7 71.925,15.7 72.525,15.7 73.125,15.7 73.725,15.7 74.325,15.7 74.925,15.7 75.525,15.7 76.125,15.7 76.825,15.8 76.825,16.45 13.725,16.7 14.325,16.7 14.925,16.7 15.525,16.7 16.125,16.7 16.725,16.7 17.325,16.7 17.925,16.7 18.525,16.7 19.125,16.7 19.725,16.7 20.325,16.7 20.925,16.7 21.525,16.7 22.125,16.7 22.725,16.7 23.325,16.7 23.925,16.7 24.525,16.7 25.125,16.7 25.725,16.7 26.325,16.7 26.925,16.7 27.525,16.7 28.125,16.7 28.725,16.7 29.325,16.7 29.925,16.7 30.525,16.7 31.125,16.7 31.725,16.7 32.325,16.7 32.925,16.7 33.525,16.7 34.125,16.7 34.725,16.7 35.325,16.7 35.925,16.7 36.525,16.7 37.125,16.7 37.725,16.7 38.325,16.7 38.925,16.7 39.525,16.7 40.125,16.7 40.725,16.7 41.325,16.7 41.925,16.7 42.525,16.7 43.125,16.7 43.725,16.7 44.325,16.7 44.925,16.7 45.525,16.7 46.125,16.7 46.725,16.7 47.325,16.7 47.925,16.7 48.525,16.7 49.125,16.7 49.725,16.7 50.325,16.7 50.925,16.7 51.525,16.7 52.125,16.7 52.725,16.7 53.325,16.7 53.925,16.7 54.525,16.7 55.125,16.7 55.725,16.7 56.325,16.7 56.925,16.7 57.525,16.7 58.125,16.7 58.725,16.7 59.325,16.7 59.925,16.7 60.525,16.7 61.125,16.7 61.725,16.7 62.325,16.7 62.925,16.7 63.525,16.7 64.125,16.7 64.725,16.7 65.325,16.7 65.925,16.7 66.525,16.7 67.125,16.7 67.725,16.7 68.325,16.7 68.925,16.7 69.525,16.7 70.125,16.7 70.725,16.7 71.325,16.7 71.925,16.7 72.525,16.7 73.125,16.7 73.725,16.7 74.325,16.7 74.925,16.7 13.125,16.9 91.75,16.925 92.775,16.925 76.875,17.1 75.825,17.175 7.725,17.325 8.325,17.325 8.925,17.325 9.525,17.325 10.125,17.325 10.725,17.325 11.325,17.325 11.925,17.325 12.525,17.325 91.65,17.575 92.7,17.575 76.975,17.75 75.95,17.825 7.125,17.875 13.125,17.875 14.325,17.875 15.525,17.875 16.725,17.875 17.925,17.875 19.125,17.875 20.325,17.875 21.525,17.875 22.725,17.875 23.925,17.875 25.125,17.875 26.325,17.875 27.525,17.875 28.725,17.875 29.925,17.875 31.125,17.875 32.325,17.875 33.525,17.875 34.725,17.875 35.925,17.875 37.125,17.875 38.325,17.875 39.525,17.875 40.725,17.875 41.925,17.875 43.125,17.875 44.325,17.875 45.525,17.875 46.725,17.875 47.925,17.875 49.125,17.875 50.325,17.875 51.525,17.875 52.725,17.875 53.925,17.875 55.125,17.875 56.325,17.875 57.525,17.875 58.725,17.875 59.925,17.875 61.125,17.875 62.325,17.875 63.525,17.875 64.725,17.875 65.925,17.875 67.125,17.875 68.325,17.875 69.525,17.875 70.725,17.875 71.925,17.875 73.125,17.875 74.325,17.875 91.5,18.225 92.575,18.225 77.15,18.4 7.125,18.475 76.1,18.475 75.325,18.5 91.3,18.85 92.4,18.875 77.375,19.025 7.125,19.075 8.325,19.075 9.525,19.075 10.725,19.075 11.925,19.075 13.125,19.075 14.325,19.075 15.525,19.075 16.725,19.075 76.3,19.1 19.15,19.175 19.75,19.175 20.35,19.175 20.95,19.175 21.55,19.175 22.15,19.175 22.75,19.175 23.35,19.175 23.95,19.175 24.55,19.175 25.15,19.175 25.75,19.175 26.35,19.175 26.95,19.175 27.55,19.175 28.15,19.175 28.75,19.175 29.35,19.175 29.95,19.175 30.55,19.175 31.15,19.175 31.75,19.175 32.35,19.175 32.95,19.175 33.55,19.175 34.15,19.175 34.75,19.175 35.35,19.175 35.95,19.175 36.55,19.175 37.15,19.175 37.75,19.175 38.35,19.175 38.95,19.175 39.55,19.175 40.15,19.175 40.75,19.175 41.35,19.175 41.95,19.175 42.55,19.175 43.15,19.175 43.75,19.175 44.35,19.175 44.95,19.175 45.55,19.175 46.15,19.175 46.75,19.175 47.35,19.175 47.95,19.175 48.55,19.175 49.15,19.175 49.75,19.175 50.35,19.175 50.95,19.175 51.55,19.175 52.15,19.175 52.75,19.175 53.35,19.175 53.95,19.175 54.55,19.175 55.15,19.175 55.75,19.175 56.35,19.175 56.95,19.175 57.55,19.175 58.15,19.175 58.75,19.175 59.35,19.175 59.95,19.175 60.55,19.175 61.15,19.175 61.75,19.175 62.35,19.175 62.95,19.175 63.55,19.175 64.15,19.175 64.75,19.175 65.35,19.175 65.95,19.175 66.55,19.175 67.15,19.175 67.75,19.175 68.35,19.175 68.95,19.175 69.55,19.175 70.15,19.175 70.75,19.175 71.35,19.175 71.95,19.175 72.55,19.175 73.15,19.175 73.75,19.175 74.35,19.175 18.525,19.2 75,19.3 17.925,19.375 91.05,19.45 92.15,19.475 75.6,19.55 77.65,19.625 7.125,19.675 17.35,19.675 76.55,19.7 90.725,20.025 16.875,20.075 91.9,20.075 78,20.2 7.125,20.275 8.325,20.275 9.525,20.275 10.725,20.275 11.925,20.275 13.125,20.275 14.325,20.275 15.525,20.275 76.85,20.3 16.45,20.5 90.375,20.575 91.575,20.65 78.375,20.75 7.125,20.875 77.175,20.875 16.025,20.925 89.95,21.075 91.2,21.2 78.8,21.25 15.525,21.3 14.925,21.45 77.55,21.425 7.125,21.475 7.725,21.475 8.325,21.475 8.925,21.475 9.525,21.475 10.125,21.475 10.725,21.475 11.325,21.475 11.925,21.475 12.525,21.475 13.125,21.475 13.725,21.475 14.325,21.475 89.5,21.575 79.275,21.725 90.8,21.725 77.975,21.925 89,22 79.775,22.15 90.35,22.2 78.45,22.375 88.45,22.4 80.325,22.525 89.875,22.65 87.875,22.75 78.925,22.825 80.9,22.85 87.275,23.05 89.35,23.075 81.5,23.125 79.45,23.225 86.65,23.275 82.125,23.35 88.8,23.425 86.025,23.475 82.775,23.525 80,23.575 85.375,23.6 83.425,23.625 84.725,23.65 84.075,23.675 88.225,23.75 80.6,23.875 87.625,24.05 81.2,24.15 87,24.275 81.825,24.35 86.375,24.475 82.475,24.525 85.725,24.6 83.125,24.65 83.775,24.7 85.075,24.7 84.425,24.725
SIG1: J1.1 | length 83.4
  Top Layer w0.124: J1.1@9.65,87.6 v1(12.1,87.6)
  Int2 (SIG) w0.124: v1(12.1,87.6) 93,87.6
SIG2: J2.1 | length 77.3
  Top Layer w0.124: J2.1@9.65,74.4 v1(12.1,74.4)
  Int2 (SIG) w0.124: v1(12.1,74.4) 86.9,74.4
SIG3: J3.1 | length 72.5
  Top Layer w0.124: J3.1@9.65,61.2 v1(12.1,61.2)
  Int2 (SIG) w0.124: v1(12.1,61.2) 82.1,61.2
SIG4: J4.1 J7.1 | length 92.4
  Top Layer w0.124: J7.1@9.65,48 v1(12.1,48)
  Int2 (SIG) w0.124: v1(12.1,48) 87.3,48 cw(c89.8,48) 87.482,47.063
SIG5: J5.1 J8.1 | length 102.9
  Top Layer w0.124: J8.1@9.65,34.8 v1(12.1,34.8)
  Int2 (SIG) w0.124: v1(12.1,34.8) 82.3,34.8 cw(c87.3,34.8) 82.428,33.675
SIG6: J6.1 | length 115.5
  Top Layer w0.124: J6.1@9.65,16.2 v1(12.1,16.2)
  Int2 (SIG) w0.124: v1(12.1,16.2) 76.3,16.2 cw(c84.3,16.2) 76.422,14.811
copper on no net: | length 53.3
  Top Layer w0.254: 41.5,3.555 43.4,3.555 43.4,6.1 41.5,6.1 41.5,3.555
  Int2 (SIG) w0.254: 45.3,3.555 47.2,3.555 47.2,6.1 45.3,6.1 45.3,3.555
  Int3 w0.254: 47.2,3.555 47.2,6.1 49.1,6.1 49.1,3.555 47.2,3.555
  Int1 w0.254: 43.4,3.555 43.4,6.1 45.3,6.1 45.3,3.555 43.4,3.555
  Int4 w0.254: 49.1,3.555 51,3.555 51,6.1 49.1,6.1 49.1,3.555
  Bottom Layer w0.254: 51,3.555 52.9,3.555 52.9,6.1 51,6.1 51,3.555

## Polygon pours and split planes (outlines as drawn)
GND6 on Top Layer "GND6_L01_P037" (solid, pour order 37): 6.6,22 73.9,22 73.9,25.3 93.393,25.3 93.393,7.1 73.9,7.1 73.9,10.4 6.6,10.4
GND1 on Top Layer "GND1_L01_P000" (solid, pour order 0): 6.6,93.4 18.7,93.4 18.7,90.8 88.025,90.8 88.025,88.351 cw(c88.025,87.626) 88.749,87.601 cw(c88.025,87.574) 88.025,86.85 88.025,84.4 18.7,84.4 18.7,81.8 6.6,81.8
GND2 on Top Layer "GND2_L01_P007" (solid, pour order 7): 6.6,80.2 20.5,80.2 20.5,77.6 82.673,77.6 cw(c82.673,75.603) 84.085,77.015 85.725,75.375 cw(c84.75,74.4) 85.725,73.425 84.088,71.788 cw(c82.67,73.203) 82.67,71.2 20.5,71.2 20.5,68.6 6.6,68.6
GND3 on Top Layer "GND3_L01_P013" (solid, pour order 13): 6.6,67 20.5,67 20.5,64.4 81.9,64.4 81.9,58 20.5,58 20.5,55.4 6.6,55.4
GND4 on Top Layer "GND4_L01_P019" (solid, pour order 19): 6.6,53.8 20.5,53.8 20.5,51.6 93.406,51.6 ccw(c153.957,48) 93.406,44.403 20.5,44.403 20.5,42.2 6.6,42.2
GND5 on Top Layer "GND5_L01_P024" (solid, pour order 24): 6.6,40.6 20.5,40.6 93.393,40.6 93.393,29 20.5,29 6.6,29
GND6 on Int1 "GND6_L02_P044" (solid, pour order 44): 6.6,22 20.5,22 20.5,19.7 73.9,19.7 cw(c84.16,16.2) 73.9,12.7 20.5,12.7 20.5,10.4 6.6,10.4
GND1 on Int1 "GND1_L02_P048" (solid, pour order 48): 6.6,93.4 18.7,93.4 18.7,90.8 88.025,90.8 88.025,88.351 cw(c88.025,87.626) 88.749,87.601 cw(c88.025,87.574) 88.025,86.85 88.025,84.4 18.7,84.4 18.7,81.8 6.6,81.8
GND2 on Int1 "GND2_L02_P008" (solid, pour order 8): 6.6,80.2 20.5,80.2 20.5,77.6 82.673,77.6 cw(c82.673,75.603) 84.085,77.015 85.725,75.375 cw(c84.75,74.4) 85.725,73.425 84.088,71.788 cw(c82.67,73.203) 82.67,71.2 20.5,71.2 20.5,68.6 6.6,68.6
GND3 on Int1 "GND3_L02_P014" (solid, pour order 14): 6.6,67 20.5,67 20.5,64.4 81.9,64.4 81.901,58 20.5,58 20.5,55.4 6.6,55.4
GND4 on Int1 "GND4_L02_P029" (solid, pour order 29): 6.6,53.8 20.5,53.8 20.5,51.5 73.9,51.5 89.596,51.5 cw(c89.598,50.943) 89.6,51.5 cw(c89.6,48) 89.6,44.5 20.5,44.5 20.5,42.2 6.6,42.2
GND5 on Int1 "GND5_L02_P030" (solid, pour order 30): 6.6,40.6 20.5,40.6 93.393,40.6 93.393,29 20.5,29 6.6,29
GND6 on Int3 "GND6_L04_P045" (solid, pour order 45): 6.6,22 20.5,22 20.5,19.7 73.9,19.7 cw(c84.16,16.2) 73.9,12.7 20.5,12.7 20.5,10.4 6.6,10.4
GND1 on Int3 "GND1_L04_P050" (solid, pour order 50): 6.6,93.4 18.7,93.4 18.7,90.8 88.025,90.8 88.025,88.351 cw(c88.025,87.626) 88.749,87.601 cw(c88.025,87.574) 88.025,86.85 88.025,84.4 18.7,84.4 18.7,81.8 6.6,81.8
GND2 on Int3 "GND2_L04_P010" (solid, pour order 10): 6.6,80.2 20.5,80.2 20.5,77.6 82.673,77.6 cw(c82.673,75.603) 84.085,77.015 85.725,75.375 cw(c84.75,74.4) 85.725,73.425 84.088,71.788 cw(c82.67,73.203) 82.67,71.2 20.5,71.2 20.5,68.6 6.6,68.6
GND3 on Int3 "GND3_L04_P016" (solid, pour order 16): 6.6,67 20.5,67 20.5,64.4 81.899,64.4 81.9,58 20.5,58 20.5,55.4 6.6,55.4
GND4 on Int3 "GND4_L04_P021" (solid, pour order 21): 6.6,53.8 20.5,53.8 20.5,51.79 93.39,51.79 93.391,44.207 20.5,44.207 20.5,42.2 6.6,42.2
GND5 on Int3 "GND5_L04_P026" (solid, pour order 26): 6.6,40.6 20.5,40.6 93.399,40.6 93.401,29 20.5,29 6.6,29
GND6 on Int4 "GND6_L05_P046" (solid, pour order 46): 6.6,22 20.5,22 20.5,19.7 73.9,19.7 cw(c84.16,16.2) 73.9,12.7 20.5,12.7 20.5,10.4 6.6,10.4
GND1 on Int4 "GND1_L05_P051" (solid, pour order 51): 6.6,93.4 18.7,93.4 18.7,90.8 88.025,90.8 88.025,88.351 cw(c88.025,87.626) 88.749,87.601 cw(c88.025,87.574) 88.025,86.85 88.025,84.4 18.7,84.4 18.7,81.8 6.6,81.8
GND2 on Int4 "GND2_L05_P011" (solid, pour order 11): 6.6,80.2 20.5,80.2 20.5,77.6 82.673,77.6 cw(c82.673,75.603) 84.085,77.015 85.725,75.375 cw(c84.75,74.4) 85.725,73.425 84.088,71.788 cw(c82.67,73.203) 82.67,71.2 20.5,71.2 20.5,68.6 6.6,68.6
GND3 on Int4 "GND3_L05_P017" (solid, pour order 17): 6.6,67 20.5,67 20.5,64.4 81.896,64.4 81.896,58 20.5,58 20.5,55.4 6.6,55.4
GND4 on Int4 "GND4_L05_P022" (solid, pour order 22): 6.6,53.8 20.5,53.8 20.5,51.79 93.39,51.79 93.391,44.207 20.5,44.207 20.5,42.2 6.6,42.2
GND5 on Int4 "GND5_L05_P027" (solid, pour order 27): 6.6,40.6 20.5,40.6 93.392,40.6 93.393,29 20.5,29 6.6,29
GND6 on Bottom Layer "GND6_L06_P047" (solid, pour order 47): 6.6,22 20.5,22 20.5,19.7 73.9,19.7 cw(c84.16,16.2) 73.9,12.7 20.5,12.7 20.5,10.4 6.6,10.4
GND1 on Bottom Layer "GND1_L06_P052" (solid, pour order 52): 6.6,93.4 18.7,93.4 18.7,90.8 88.025,90.8 88.025,88.351 cw(c88.025,87.626) 88.749,87.601 cw(c88.025,87.574) 88.025,86.85 88.025,84.4 18.7,84.4 18.7,81.8 6.6,81.8
GND2 on Bottom Layer "GND2_L06_P012" (solid, pour order 12): 6.6,80.2 20.5,80.2 20.5,77.6 82.673,77.6 cw(c82.673,75.603) 84.085,77.015 85.725,75.375 cw(c84.75,74.4) 85.725,73.425 84.088,71.788 cw(c82.67,73.203) 82.67,71.2 20.5,71.2 20.5,68.6 6.6,68.6
GND3 on Bottom Layer "GND3_L06_P018" (solid, pour order 18): 6.6,67 20.5,67 20.5,64.4 81.896,64.4 81.896,58 20.5,58 20.5,55.4 6.6,55.4
GND4 on Bottom Layer "GND4_L06_P023" (solid, pour order 23): 6.6,53.8 20.5,53.8 20.5,51.79 93.39,51.79 93.391,44.207 20.5,44.207 20.5,42.2 6.6,42.2
GND5 on Bottom Layer "GND5_L06_P028" (solid, pour order 28): 6.6,40.6 20.5,40.6 93.362,40.6 93.364,29 20.5,29 6.6,29
GND6 on Int2 (SIG) "GND6_L03_P039" (solid, pour order 39): 6.6,22 20.5,22 20.5,19.7 73.9,19.7 cw(c84.16,16.2) 73.9,12.7 20.5,12.7 20.5,10.4 6.6,10.4
GND1 on Int2 (SIG) "GND1_L03_P049" (solid, pour order 49): 6.6,93.4 18.7,93.4 18.7,90.8 88.025,90.8 88.025,88.351 cw(c88.025,87.626) 88.749,87.601 cw(c88.025,87.574) 88.025,86.85 88.025,84.4 18.7,84.4 18.7,81.8 6.6,81.8
GND2 on Int2 (SIG) "GND2_L03_P009" (solid, pour order 9): 6.6,80.2 20.5,80.2 20.5,77.6 82.673,77.6 cw(c82.673,75.603) 84.085,77.015 85.725,75.375 cw(c84.75,74.4) 85.725,73.425 84.088,71.788 cw(c82.67,73.203) 82.67,71.2 20.5,71.2 20.5,68.6 6.6,68.6
GND3 on Int2 (SIG) "GND3_L03_P015" (solid, pour order 15): 6.6,67 20.5,67 20.5,64.4 81.9,64.4 81.9,58 20.5,58 20.5,55.4 6.6,55.4
GND4 on Int2 (SIG) "GND4_L03_P020" (solid, pour order 20): 6.6,53.8 20.5,53.8 20.5,51.79 93.39,51.79 93.391,44.207 20.5,44.207 20.5,42.2 6.6,42.2
GND5 on Int2 (SIG) "GND5_L03_P025" (solid, pour order 25): 6.6,40.6 20.5,40.6 20.5,38.3 73.9,38.3 76.804,38.3 ccw(c76.804,57.599) 84.875,40.068 cw(c87.3,34.8) 93.1,34.8 cw(c87.3,34.8) 84.875,29.531 ccw(c76.804,12.001) 76.804,31.3 20.5,31.3 20.5,29 6.6,29

## Other copper
Top Layer:
  text "1" at 41.5,3.555 h2.5
Int2 (SIG):
  region net GND6: 76.501,14.602 76.194,14.515 76.272,14.213 cw(c76.633,14.263)
  region net GND6: 76.744,14.684 76.47,14.596 cw(c76.508,14.297) 76.806,14.344
  region net GND6: 76.161,14.676 76.192,14.503 76.785,14.692 76.659,14.934 ccw(c76.421,14.811) 76.161,14.75
  region net GND5: 82.168,33.541 82.223,33.378 82.791,33.556 82.665,33.799 ccw(c82.428,33.675) 82.168,33.614
  region net GND5: 82.789,33.555 82.507,33.467 cw(c82.578,33.216) 82.827,33.295
  region net GND5: 82.507,33.467 82.224,33.385 82.32,33.08 cw(c82.708,33.13)
  region net GND4: 87.596,46.872 87.331,46.742 87.487,46.475 cw(c87.843,46.591)
  region net GND4: 87.858,47.008 87.596,46.872 cw(c87.71,46.637) 87.941,46.758
  region net GND4: 87.334,46.736 87.858,47.008 87.671,47.252 ccw(c87.482,47.064) 87.225,46.99
  region net SIG2: 89.9,71.2 ccw(c89.9,74.4) 89.9,77.6 86.7,74.4
  region net SIG3: 93.1,56.25 93.1,66.15 ccw(c92.55,66.15) 92.55,66.7 82.65,66.7 ccw(c82.65,66.15) 82.1,66.15 82.1,56.25 ccw(c82.65,56.25) 82.65,55.7 92.55,55.7 ccw(c92.55,56.25)
  text "3" at 45.3,3.555 h2.5
Int3:
  text "4" at 49.1,3.555 h2.5
Int1:
  text "2" at 43.4,3.555 h2.5
Int4:
  text "5" at 51,3.555 h2.5
Bottom Layer:
  text "6" at 52.9,3.555 h2.5
Multi-Layer:
  pour cut-out: 73.9,8.8 20.5,8.8 20.5,13 73.9,13
  pour cut-out: 73.9,58.006 20.5,58.006 20.5,51.2 73.9,51.2
  pour cut-out: 84.3,16.7 93.396,16.7 93.396,15.7 84.3,15.7
  pour cut-out: 87.3,35.3 93.396,35.3 93.396,34.3 87.3,34.3
  pour cut-out: 89.8,48.5 94.775,48.5 94.775,47.5 89.8,47.5
  pour cut-out: 73.9,31.606 20.5,31.606 20.5,19.4 73.9,19.4
  pour cut-out: 76.502,44.806 20.5,44.806 20.5,38 76.502,38
  pour cut-out: 82.1,44.806 78.9,44.806 78.9,42.9 82.1,42.9
  pour cut-out: 25.5,71.206 20.5,71.206 20.5,64.4 25.5,64.4

## Silkscreen, mask and mechanical layers (free items; w line width, h text height)
Top Overlay:
  drawing of 8 lines, arcs and shapes, not listed
  text "E-Field" at 19,88.246 h1.52
  text "Point" at 19,86.071 h1.52
  text "E-Field" at 19,75.046 h1.52
  text "6 mm" at 19,72.918 h1.52
  text "E-Field" at 19,61.846 h1.52
  text "11 mm" at 19,59.708 h1.52
  text "Fits TE CONSMB003.062-G SMB Connectors" at 3.586,57.7 h2 r90
  text "H-Field" at 19,48.646 h1.52
  text "5 mm" at 19,46.518 h1.52
  text "H-Field" at 19,35.446 h1.52
  text "10 mm" at 19,33.311 h1.52
  text "Designed by Peter Barnes" at 51.7,25.998 h1.4
  text "Near Field Probe Set" at 24.2,24.904 h2
  text "github.com/pe5er/nearfieldprobes" at 51.7,24.498 h1.4
  text "H-Field" at 19,16.846 h1.52
  text "16 mm" at 19,14.716 h1.52
  text "JLCJLCJLCJLC" at 4.9,1.913 h2
Bottom Overlay:
  drawing of 8 lines, arcs and shapes, not listed
  text "Point" at 19,89.154 h1.52 r180
  text "E-Field" at 19,86.954 h1.52 r180
  text "6 mm" at 19,75.907 h1.52 r180
  text "E-Field" at 19,73.754 h1.52 r180
  text "11 mm" at 19,62.716 h1.52 r180
  text "E-Field" at 19,60.554 h1.52 r180
  text "5 mm" at 19,49.507 h1.52 r180
  text "H-Field" at 19,47.354 h1.52 r180
  text "10 mm" at 19,36.314 h1.52 r180
  text "H-Field" at 19,34.154 h1.52 r180
  text "16 mm" at 19,17.709 h1.52 r180
  text "H-Field" at 19,15.654 h1.52 r180
Top Solder:
  rectangle: 41.3,3.4 53.1,6.3
  lines w0.124: 12.1,16.2 76.3,16.2 cw(c84.3,16.2) 92.277,16.811 ; 12.1,48 87.3,48 cw(c89.8,48) 92.227,48.599 ; 12.1,61.2 81.8,61.2 ; 12.1,74.4 86.1,74.4 ; 12.1,87.6 88.7,87.6 ; 76.422,14.811 ccw(c84.3,16.2) 92.278,15.602 ; 82.428,33.675 ccw(c87.3,34.8) 92.263,34.192 ; 87.482,47.063 ccw(c89.8,48) 92.226,47.396 ; 92.263,35.409 ccw(c87.3,34.8) 82.3,34.8 ; 12.1,34.8 82.3,34.8 ; 12.1,34.8 12.1,34.8 ; 12.1,34.8 82.3,34.8
  lines w1.5: 18.986,44.5 87.3,44.5 ; 18.986,44.5 ccw(c18.986,42.12) 17.303,43.803 16.304,42.804 cw(c14.846,44.262) 14.846,42.2 6.6,42.2 6.6,53.8 14.846,53.8 cw(c14.846,51.738) 16.304,53.196 17.303,52.197 ccw(c18.986,53.88) 18.986,51.5 87.385,51.5 ; 73.5,12.7 18.986,12.7 ccw(c18.986,10.32) 17.303,12.003 16.304,11.004 cw(c14.846,12.462) 14.846,10.4 6.6,10.4 6.6,22 14.846,22 cw(c14.846,19.938) 16.304,21.396 17.303,20.397 ccw(c18.986,22.08) 18.986,19.7 73.5,19.7 ; 76.502,31.3 18.986,31.3 ccw(c18.986,28.92) 17.303,30.603 16.304,29.604 cw(c14.846,31.062) 14.846,29 6.6,29 6.6,40.6 14.846,40.6 cw(c14.846,38.538) 16.304,39.996 17.303,38.997 ccw(c18.986,40.68) 18.986,38.3 76.502,38.3 ; 81.05,56.2 81.05,57.7 18.986,57.7 ccw(c18.986,55.32) 17.303,57.003 16.304,56.004 cw(c14.846,57.462) 14.846,55.4 6.6,55.4 6.6,67 14.846,67 cw(c14.846,64.938) 16.304,66.396 17.303,65.397 ccw(c18.986,67.08) 18.986,64.7 81.05,64.7 81.05,66.2 ; 82.6,70.9 18.986,70.9 ccw(c18.986,68.52) 17.303,70.203 16.304,69.204 cw(c14.846,70.662) 14.846,68.6 6.6,68.6 6.6,80.2 14.846,80.2 cw(c14.846,78.138) 16.304,79.596 17.303,78.597 ccw(c18.986,80.28) 18.986,77.9 82.6,77.9 ; 86.9,84.1 18.986,84.1 ccw(c18.986,81.72) 17.303,83.403 16.304,82.404 cw(c14.846,83.862) 14.846,81.8 6.6,81.8 6.6,93.4 14.846,93.4 cw(c14.846,91.338) 16.304,92.796 17.256,91.844 ccw(c19.052,93.64) 19.052,91.1 20.6,91.1 86.9,91.1
Bottom Solder:
  rectangle: 41.3,3.4 53.1,6.3
  lines w0.124: 12.1,16.2 76.3,16.2 cw(c84.3,16.2) 92.277,16.811 ; 12.1,34.8 82.3,34.8 cw(c87.3,34.8) 92.263,35.409 ; 12.1,48 87.3,48 cw(c89.8,48) 92.227,48.599 ; 12.1,61.2 81.8,61.2 ; 12.1,74.4 86.1,74.4 ; 12.1,87.6 88.7,87.6 ; 76.422,14.811 ccw(c84.3,16.2) 92.278,15.602 ; 82.428,33.675 ccw(c87.3,34.8) 92.263,34.192 ; 87.482,47.063 ccw(c89.8,48) 92.226,47.396
  lines w1.5: 18.986,44.5 87.3,44.5 ; 18.986,44.5 ccw(c18.986,42.12) 17.303,43.803 16.304,42.804 cw(c14.846,44.262) 14.846,42.2 6.6,42.2 6.6,53.8 14.846,53.8 cw(c14.846,51.738) 16.304,53.196 17.303,52.197 ccw(c18.986,53.88) 18.986,51.5 87.385,51.5 ; 73.5,12.7 18.986,12.7 ccw(c18.986,10.32) 17.303,12.003 16.304,11.004 cw(c14.846,12.462) 14.846,10.4 6.6,10.4 6.6,22 14.846,22 cw(c14.846,19.938) 16.304,21.396 17.303,20.397 ccw(c18.986,22.08) 18.986,19.7 73.5,19.7 ; 76.502,31.3 18.986,31.3 ccw(c18.986,28.92) 17.303,30.603 16.304,29.604 cw(c14.846,31.062) 14.846,29 6.6,29 6.6,40.6 14.846,40.6 cw(c14.846,38.538) 16.304,39.996 17.303,38.997 ccw(c18.986,40.68) 18.986,38.3 76.502,38.3 ; 81.05,56.2 81.05,57.7 18.986,57.7 ccw(c18.986,55.32) 17.303,57.003 16.304,56.004 cw(c14.846,57.462) 14.846,55.4 6.6,55.4 6.6,67 14.846,67 cw(c14.846,64.938) 16.304,66.396 17.303,65.397 ccw(c18.986,67.08) 18.986,64.7 81.05,64.7 81.05,66.2 ; 82.6,70.9 18.986,70.9 ccw(c18.986,68.52) 17.303,70.203 16.304,69.204 cw(c14.846,70.662) 14.846,68.6 6.6,68.6 6.6,80.2 14.846,80.2 cw(c14.846,78.138) 16.304,79.596 17.303,78.597 ccw(c18.986,80.28) 18.986,77.9 82.6,77.9 ; 86.9,84.1 18.986,84.1 ccw(c18.986,81.72) 17.303,83.403 16.304,82.404 cw(c14.846,83.862) 14.846,81.8 6.6,81.8 6.6,93.4 14.846,93.4 cw(c14.846,91.338) 16.304,92.796 17.256,91.844 ccw(c19.052,93.64) 19.052,91.1 20.6,91.1 86.9,91.1
Board Outline:
  the board outline again, w0.2
Cutouts:
  drawing of 178 lines, arcs and shapes, not listed